# Altium PCB MCU Circuit.PcbDoc
Units mm, origin at the board's own origin, x right, y up, seen from the top; angles counter-clockwise.
Board outline 74 x 54 mm, 2 copper layers (Top Layer, Bottom Layer), stack 1.1 mm thick; 29 components, 31 nets, 128 pads, 42 vias.
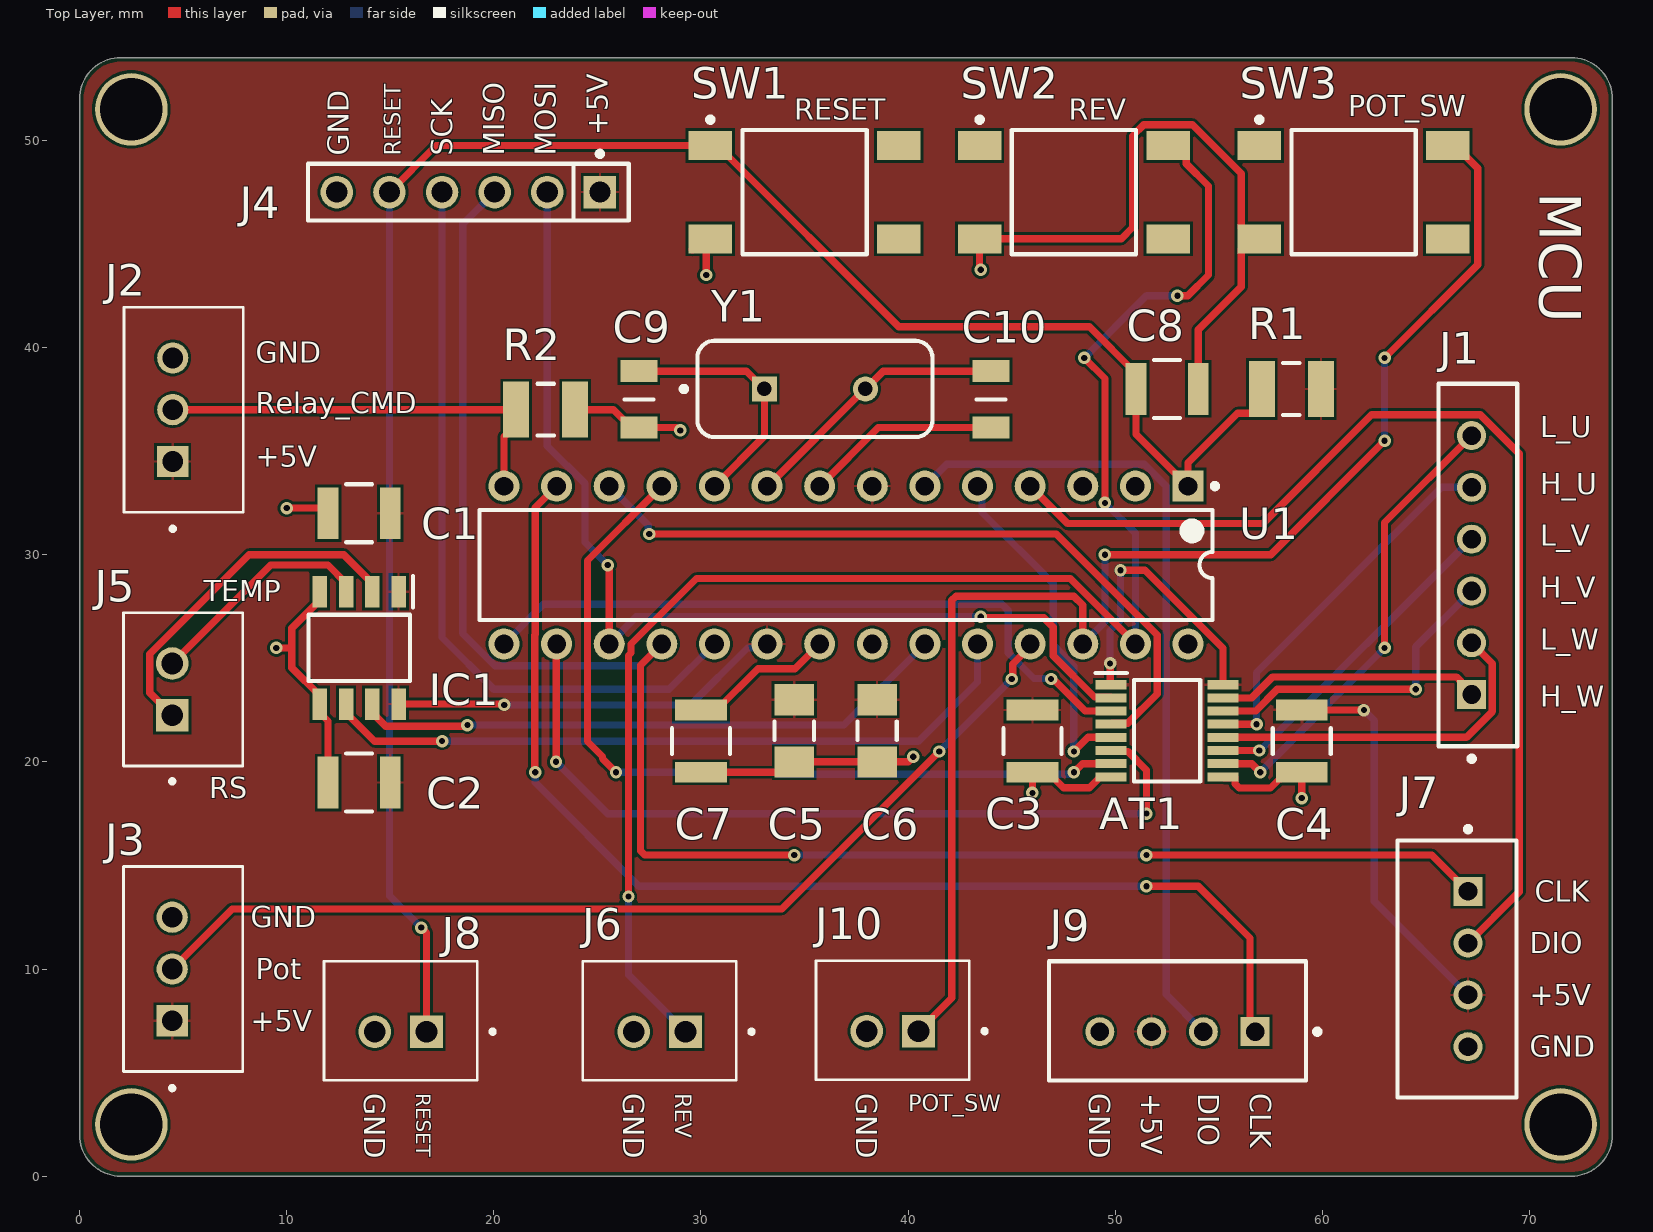
[diagram p0: Top Layer view]
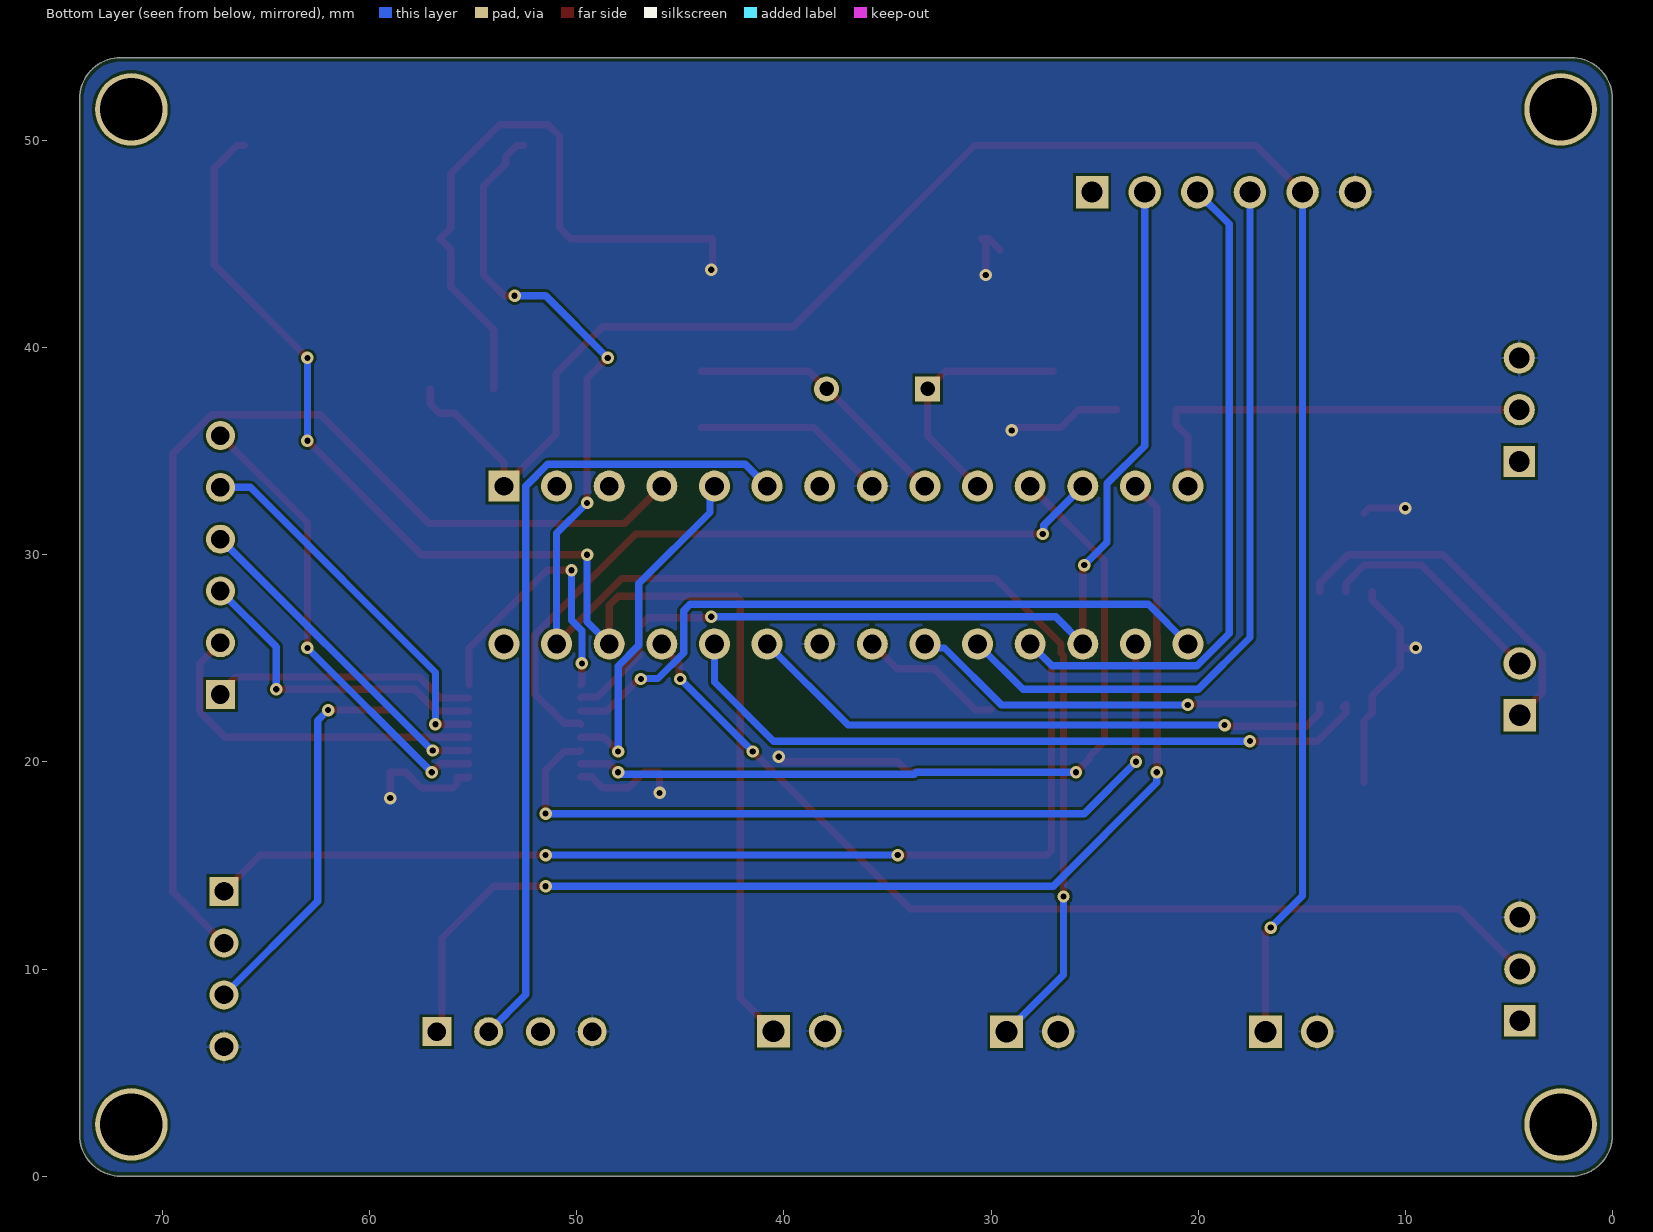
[diagram p1: Bottom Layer view, seen from below]
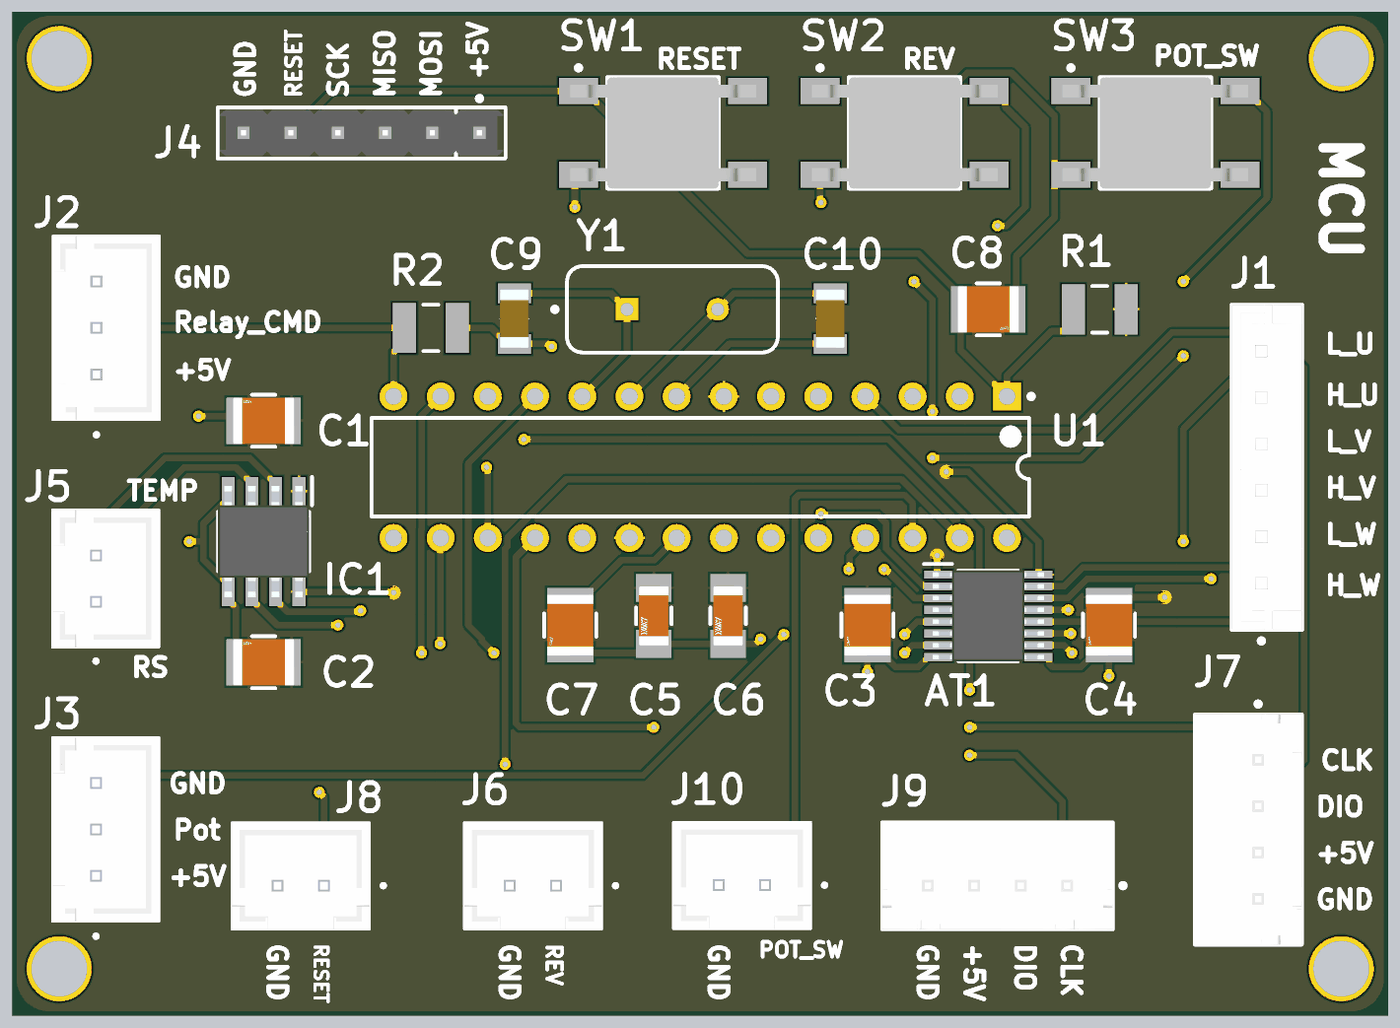
[diagram p2: 3D render of the assembled board from above, using the file's embedded part models]

## Layer stack, top to bottom
Top Solder: solder mask 0.05, Solder Resist, Dk 3.5
Top Layer: signal copper 0.1
Dielectric 1: dielectric 0.9, FR-4, Dk 4.8
Bottom Layer: signal copper 0.1
Bottom Solder: solder mask 0.05, Solder Resist, Dk 3.5

## Board outline
2,0 cw(c2,2) 0,2 0,52 cw(c2,52) 2,54 72,54 cw(c72,52) 74,52 74,2 cw(c72,2) 72,0

## Design rules (kind name [scope] priority, off if disabled: settings)
BoardOutlineClearance [All] p1: gap=0.2 ignorepadtopadclearanceinfootprint=FALSE
Clearance [All] p1: gap=0.127 ignorepadtopadclearanceinfootprint=FALSE except(0.25: Arc-Hole Track-Hole SMDPad-Hole THPad-Hole Via-Hole Fill-Hole Poly-Hole Region-Hole Text-Hole)
ComponentClearance [All] p1: gap=0.127 collisioncheckmode=3 verticalgap=0.127 showdistances=TRUE
DiffPairsRouting [All] p1: maxlimit=0.254 minlimit=0.127 mostfreqgap=0.127 toplayer_minwidth=0.127 toplayer_maxwidth=25.4 toplayer_prefwidth=0.127 bottomlayer_minwidth=0.127 bottomlayer_maxwidth=25.4 bottomlayer_prefwidth=0.127 maxuncoupledlength=12.7
Height [All] p1: minheight=0 maxheight=1816.048 prefheight=12.7
HoleSize [All] p1: absolutevalues=TRUE maxlimit=6.3 minlimit=0.3 maxpercent=80.000 minpercent=20.000
HoleToHoleClearance [All] p1: gap=0.25 allowstackedmicrovias=FALSE
MinimumAnnularRing [All] p1: minimumring=0.076
MinimumSolderMaskSliver [All] p1: minsoldermaskwidth=0
PlaneClearance [All] p1: clearance=0.127
PlaneConnect PlaneConnectPowerPads [InPadClass('PowerPads')] p1: planeconnectstyle=Direct reliefexpansion=0.508 reliefentries=4 reliefconductorwidth=0.254 reliefairgap=0.254
PlaneConnect [All] p2: pad.planeconnectstyle=Relief pad.reliefexpansion=0.3 pad.reliefentries=4 pad.reliefconductorwidth=0.127 pad.reliefairgap=0.127 via.planeconnectstyle=Direct via.reliefexpansion=0.3 via.reliefentries=4 via.reliefconductorwidth=0.127 via.reliefairgap=0.127
PolygonConnect PolygonConnectPowerPads [All vs (InPadClass('PowerPads'))] p1: connectstyle=Direct reliefconductorwidth=0.254 reliefentries=4 polygonreliefangle="90 Angle" airgapwidth=0.254
PolygonConnect [All] p2: thpad.connectstyle=Relief thpad.reliefconductorwidth=0.127 thpad.reliefentries=4 thpad.polygonreliefangle="90 Angle" thpad.airgapwidth=0.127 smdpad.connectstyle=Relief smdpad.reliefconductorwidth=0.127 smdpad.reliefentries=4 smdpad.polygonreliefangle="90 Angle" smdpad.airgapwidth=0.127 via.connectstyle=Direct via.reliefconductorwidth=0.127 via.reliefentries=4 via.polygonreliefangle="90 Angle" via.airgapwidth=0.127
RoutingVias [All] p1: holewidth=0.3 width=0.6 viastyle="Through Hole" minholewidth=0.3 minwidth=0.6 maxholewidth=0.6 maxwidth=6.6
SilkToSilkClearance [All] p1: silktosilkclearance=0
SilkToSolderMaskClearance [IsPad] p1: minsilkscreentomaskgap=0.127 clearancetoexposedcopper=TRUE
SolderMaskExpansion [All] p1: expansion=0.075 istentingtop=FALSE
Width [All] p1: maxlimit=0.4 minlimit=0.35 preferedwidth=0.35
20 further rules are at their usual default settings.

## Components (designator, comment, footprint, x,y, rotation, side; value= is the part's Value field where it differs from the comment)
AT1 "SI8065AA-B-IUR" SOP64P600X175-16N 52.5,21.5 r0 top
C1 "100nF/25V" FP-1210-L_3_3_0_4-W_2_5_0-MFG 13.5,32 r180 top
C2 "100nF/25V" FP-1210-L_3_3_0_4-W_2_5_0-MFG 13.5,19 r180 top
C3 "100nF/25V" FP-1210-L_3_3_0_4-W_2_5_0-MFG 46,21 r270 top
C4 "100nF/25V" FP-1210-L_3_3_0_4-W_2_5_0-MFG 59,21 r270 top
C5 "10uF/16V" FP-1206-L_3_2_0_2-W_1_6_0-IPC_A 34.5,21.5 r270 top
C6 "10uF/16V" FP-1206-L_3_2_0_2-W_1_6_0-IPC_A 38.5,21.5 r270 top
C7 "100nF/25V" FP-1210-L_3_3_0_4-W_2_5_0-MFG 30,21 r270 top
C8 "100nF/25V" FP-1210-L_3_3_0_4-W_2_5_0-MFG 52.5,38 r0 top
C9 "22pF/10V" CAPC3216X90N 27,37.5 r90 top
C10 "22pF/10V" CAPC3216X90N 44,37.5 r90 top
IC1 "SI8620AB-B-IS" SOIC127P600X175-8N 13.5,25.5 r270 top
J1 "B6B-EH-A(LF)(SN)" FP-B6B-EH-A_LF_SN-MFG 67.5,29.5 r90 top
J2 "B3B-XH-A_(LF)(SN)" "JST_B3B-XH-A (LF)(SN)" 5.025,37 r270 top
J3 "B3B-XH-A_(LF)(SN)" "JST_B3B-XH-A (LF)(SN)" 5,10 r270 top
J4 "22-28-4060" FP-22-28-4060-MFG 18.77,47.5 r180 top
J5 "B2B-XH-A_(LF)(SN)" JST_B2B-XH-A_(LF)(SN) 5,23.5 r270 top
J6 "B2B-XH-A_(LF)(SN)" JST_B2B-XH-A_(LF)(SN) 28,7.5 r0 top
J7 "B4B-XH-A(LF)(SN)" FP-B4B-XH-A_LF_SN-MFG 66.5,10 r90 top
J8 "B2B-XH-A_(LF)(SN)" JST_B2B-XH-A_(LF)(SN) 15.5,7.5 r0 top
J9 "B4B-XH-A(LF)(SN)" FP-B4B-XH-A_LF_SN-MFG 53,7.5 r0 top
J10 "B2B-XH-A_(LF)(SN)" JST_B2B-XH-A_(LF)(SN) 39.25,7.525 r0 top
R1 "10k" RESC3225X70X50NL20T20 58.5,38 r0 top
R2 "3.3k" RESC3225X70X50NL20T20 22.5,37 r180 top
SW1 "FSM4JSMATR" TECO-FSM4JSMATR_V 35,47.5 r90 top
SW2 "FSM4JSMATR" TECO-FSM4JSMATR_V 48,47.5 r90 top
SW3 "FSM4JSMATR" TECO-FSM4JSMATR_V 61.5,47.5 r90 top
U1 "ATmega328-PU" 28P3 37,29.5 r270 top
Y1 "16MHz" FOX-FOXSLF160-20 35.5,38 r0 top

## Footprints (in the part's own frame and the unit in brackets; to place one, negate y for a bottom-side part, rotate by r counter-clockwise, add the part's x,y. Pads: shape width x height; smd on the part's side, far side on the other; paste and mask are expansions set on the pad)
28P3 [mm] "28-Pin Plastic Dual In-Line Package (PDIP)"
  rect 1.5x1.5 hole 0.9: 1(-3.81,16.51)
  round 1.5 hole 0.9: 2(-3.81,13.97) 3(-3.81,11.43) 4(-3.81,8.89) 5(-3.81,6.35) 6(-3.81,3.81) 7(-3.81,1.27) 8(-3.81,-1.27) 9(-3.81,-3.81) 10(-3.81,-6.35) 11(-3.81,-8.89) 12(-3.81,-11.43) 13(-3.81,-13.97) 14(-3.81,-16.51) 15(3.81,-16.51) 16(3.81,-13.97) 17(3.81,-11.43) 18(3.81,-8.89) 19(3.81,-6.35) 20(3.81,-3.81) 21(3.81,-1.27) 22(3.81,1.27) 23(3.81,3.81) 24(3.81,6.35) 25(3.81,8.89) 26(3.81,11.43) 27(3.81,13.97) 28(3.81,16.51)
  silkscreen extent -3.93,-17.7 2.65,17.94, body extent -3.6,-17.65 3.6,17.65, height 4.58
CAPC3216X90N [mm]
  rect 1.06x1.78 smd: 1(-1.36,0) 2(1.36,0)
  silkscreen extent 0,-0.7 0,0.7, body extent -1.6,-0.8 1.6,0.8, height 0.9
FOX-FOXSLF160-20 [mm] "THD, 2-Leads, Body 11.35x4.65mm"
  rect 1.2x1.2 hole 0.7: 1(-2.44,0)
  round 1.2 hole 0.7: 2(2.44,0)
  silkscreen extent -6.45,-2.32 5.68,2.32, body extent -5.67,-2.32 5.68,2.33, height 3.6
FP-22-28-4060-MFG [mm]
  rect 1.57x1.57 hole 1.02 paste-1000 mask+0: 1(-6.35,0)
  round 1.57 hole 1.02 paste-1000 mask+0: 2(-3.81,0) 3(-1.27,0) 4(1.27,0) 5(3.81,0) 6(6.35,0)
  silkscreen extent -7.75,-1.97 7.75,1.37, body extent -7.85,-1.47 7.85,1.47, height 0.25
FP-1206-L_3_2_0_2-W_1_6_0-IPC_A [mm]
  rect 1.505x1.906 smd paste+0 mask+0: 1(-1.501,0) 2(1.501,0)
  silkscreen extent -0.45,-0.95 0.45,0.95, body extent -2.75,-1.45 2.75,1.45, height 0.25
FP-1210-L_3_3_0_4-W_2_5_0-MFG [mm]
  rect 1x2.5 smd paste+0 mask+0: 1(-1.5,0) 2(1.5,0)
  silkscreen extent -0.63,-1.4 0.63,1.4, body extent -2.1,-1.45 2.1,1.45, height 0.25
FP-B4B-XH-A_LF_SN-MFG [mm]
  rect 1.4x1.4 hole 0.9 paste-1000 mask+0: 1(3.75,-0.525)
  round 1.4 hole 0.9 paste-1000 mask+0: 2(1.25,-0.525) 3(-1.25,-0.525) 4(-3.75,-0.525)
  silkscreen extent -6.2,-2.88 6.87,2.88, body extent -6.3,-2.98 6.3,2.98, height 0.25
FP-B6B-EH-A_LF_SN-MFG [mm]
  rect 1.4x1.4 hole 0.9 paste-1000 mask+0: 1(-6.25,0.3)
  round 1.4 hole 0.9 paste-1000 mask+0: 2(-3.75,0.3) 3(-1.25,0.3) 4(1.25,0.3) 5(3.75,0.3) 6(6.25,0.3)
  silkscreen extent -9.47,-1.9 8.75,1.9, body extent -8.85,-2 8.85,2, height 0.25
JST_B2B-XH-A_(LF)(SN) [mm]
  rect 1.575x1.575 / inner round 1.575 / far side rect 1.575x1.575 hole 1.05: 1(1.25,-0.525)
  round 1.575 hole 1.05: 2(-1.25,-0.525)
  silkscreen extent -3.7,-2.88 4.54,2.88, body extent -3.7,-2.88 3.7,2.88, height 7
"JST_B3B-XH-A (LF)(SN)" [mm]
  rect 1.508x1.508 / inner round 1.508 / far side rect 1.508x1.508 hole 1: 1(2.5,-0.525)
  round 1.508 hole 1: 2(0,-0.525) 3(-2.5,-0.525)
  silkscreen extent -4.95,-2.88 5.85,2.88, body extent -4.95,-2.88 4.95,2.88, height 7
RESC3225X70X50NL20T20 [mm] "Chip Resistor, 2-Leads, Body 3.20x2.50mm, IPC Medium Density"
  rect 1.25x2.7 smd: 1(-1.425,0) 2(1.425,0)
  silkscreen extent -0.4,-1.25 0.4,1.25, body extent -1.7,-1.35 1.7,1.35, height 0.7
SOIC127P600X175-8N [mm]
  rect 1.525x0.7 smd: 1(-2.712,1.905) 2(-2.712,0.635) 3(-2.712,-0.635) 4(-2.712,-1.905) 5(2.712,-1.905) 6(2.712,-0.635) 7(2.712,0.635) 8(2.712,1.905)
  silkscreen extent -3.47,-2.45 1.6,2.61, body extent -3,-2.45 3,2.45, height 1.75
SOP64P600X175-16N [mm]
  rect 1.5x0.435 smd: 1(-2.7,2.222) 2(-2.7,1.588) 3(-2.7,0.952) 4(-2.7,0.318) 5(-2.7,-0.318) 6(-2.7,-0.952) 7(-2.7,-1.588) 8(-2.7,-2.222) 9(2.7,-2.222) 10(2.7,-1.588) 11(2.7,-0.952) 12(2.7,-0.318) 13(2.7,0.318) 14(2.7,0.952) 15(2.7,1.588) 16(2.7,2.222)
  silkscreen extent -3.45,-2.44 1.6,2.79, body extent -3,-2.44 3,2.44, height 1.75
TECO-FSM4JSMATR_V [mm] "SMD, 4-Leads, Body 6x6mm, Pitch 4.5mm"
  rect 1.4x2.1 smd: 1(2.25,4.55) 2(2.25,-4.55) 3(-2.25,4.55) 4(-2.25,-4.55)
  silkscreen extent -3,-3 3.62,4.67, body extent -3,-5 3,5, height 5.08

## Part data
AT1: "Attenuator or Isolator", Manufacturer_Name="Silicon Labs", Mouser Part Number=634-SI8065AA-B-IUR, Arrow Part Number=SI8065AA-B-IUR, Arrow Price/Stock=https://www.arrow.com/en/products/si8065aa-b-iur/silicon-labs, Datasheet Link=https://www.mouser.com/datasheet/2/368/Si80xx-1kV-1398000.pdf, Height=1.75mm, Manufacturer_Part_Number=SI8065AA-B-IUR, Mouser Price/Stock=https://www.mouser.com/Search/Refine.aspx?Keyword=634-SI8065AA-B-IUR
C1 C2 C3 C4 C7 C8: library part CMP-1038-01657-2, "General Purpose Ceramic Capacitor, 1210, 100nF, 10%, X7R, +15%, 50V", Capacitance=100nF, Case Code (Imperial)=1210, Case Code (Metric)=3225, Dielectric=X7R, Insulation Resistance=100GR, Max Operating Temperature=125°C, Min Operating Temperature=-55°C, Package Quantity=1, Tolerance=10%, Voltage=50V, Case/Package=1210, Construction=Flat, Depth=2.5mm, Dissipation Factor=2.5%, Height=0.94mm, Lead Free="Lead Free", Length=3.2mm, Mount="Surface Mount", Number of Pins=2, Packaging="Tape and Reel", REACH SVHC="No SVHC", RoHS Compliant=Yes, Series=-, Termination=SMD/SMT, Thickness=0.037inch, Voltage Rating=50V, Voltage Rating (DC)=50V, Width=0.098inch
C5 C6: library part CMP-04427-021870-1, "General Purpose Ceramic Capacitor, 1206, 10uF, 10%, X5R, 15%, 10V", Capacitance=10uF, Case Code (Imperial)=1206, Case Code (Metric)=3216, Dielectric=X5R, Max Operating Temperature=85°C, Min Operating Temperature=-55°C, Package Quantity=1, Tolerance=10%, Voltage=10V, Case/Package=1206, Construction=Flat, Contact Plating=Tin, Depth=1.6mm, Height=0.07mm, Lead Free="Lead Free", Length=3.2mm, Mount="Surface Mount", Number of Pins=2, Packaging="Tape and Reel", Radiation Hardening=No, REACH SVHC="No SVHC", RoHS Compliant=Yes, Series=-, Size=1.78mm, Termination=SMD/SMT, Thickness=0.07inch, Voltage Rating=10V, Voltage Rating (DC)=10V, Width=0.063inch
C9 C10: library part 885012008002, "Capacitor", Manufacturer_Name="Wurth Elektronik", Mouser Part Number=710-885012008002, Datasheet Link=https://katalog.we-online.com/pbs/datasheet/885012008002.pdf, Height=0.9mm, Manufacturer_Part_Number=885012008002, Mouser Price/Stock=https://www.mouser.com/Search/Refine.aspx?Keyword=710-885012008002
IC1: "Integrated Circuit", Manufacturer_Name=Skyworks, Mouser Part Number=634-SI8620AB-B-IS, Arrow Part Number=SI8620AB-B-IS, Arrow Price/Stock=https://www.arrow.com/en/products/si8620ab-b-is/skyworks-solutions?region=nac, Datasheet Link=https://www.skyworksinc.com/-/media/Skyworks/SL/documents/public/data-sheets/si86xx-1Mbps-datasheet.pdf, Height=1.75mm, Manufacturer_Part_Number=SI8620AB-B-IS, Mouser Price/Stock=https://www.mouser.co.uk/ProductDetail/Skyworks-Solutions-Inc/SI8620AB-B-IS?qs=j6MGy4L9yX39miC9%252BsIUmA%3D%3D
J1: library part CMP-17439-000293-1, "CONN HEADER VERT 6POS 2.5MM", Color=Natural, Current Rating=3A, Flammability Rating="UL94 V-0", Housing Color=White, Voltage Rating=250V, Connector Type=Header, Contact Finish - Mating=TIN, Contact Material=Brass, Contact Mating Length=0.13inch, Contact Plating=Tin, Contact Shape=Square, Contact Type="Male Pin", Fastening Type=Friction, Gender=Male, Insulation Color=Natural, Insulation Material=Nylon, Lead Free="Lead Free", Mated Stacking Heights=8.1mm, Mount="Through Hole", Number of Contacts=6, Number of Positions=6, Number of Rows=1, Orientation=Straight, Packaging=Bulk, Pitch=2.5mm, Series=EH, Termination=Solder
J2 J3: "Connector Header Through Hole 3 position 0.098 (2.50mm)", Package=None, Check_prices=https://www.snapeda.com/parts/B3B-XH-A%20(LF)(SN)/JST+Sales+America+Inc./view-part/?ref=eda, MF="JST Sales America Inc.", MP="B3B-XH-A (LF)(SN)", SnapEDA_Link=https://www.snapeda.com/parts/B3B-XH-A%20(LF)(SN)/JST+Sales+America+Inc./view-part/?ref=snap
J4: library part CMP-04776-000763-1, "CONN HEADER VERT 6POS 2.54MM", Color=Black, Contact Resistance=20mR, Current Rating=4A, Max Operating Temperature=75°C, Max Voltage Rating (AC)=250V, Max Voltage Rating (DC)=250.25kV, Min Operating Temperature=0°C, Package Quantity=1, Connector Type="Male Pin", Contact Material=Brass, Contact Mating Length=0.24inch, Contact Plating=Tin, Contact Type="Male Pin", Depth=2.49mm, Gender=Male, Housing Color=Black, Housing Material=Thermoplastic, Length=15.24mm, Mount="Through Hole", Number of Contacts=6, Number of Positions=6, Number of Rows=1, Orientation=Straight, Packaging=Bulk, Pitch=2.54mm, RoHS Compliant=Yes, Series="KK® 42375", Termination=Solder, Voltage Rating=250V
J5 J6 J8 J10: "Connector Header Through Hole 2 position 0.098 (2.50mm)", Package=None, Check_prices=https://www.snapeda.com/parts/B2B-XH-A%20(LF)(SN)/JST+Sales+America+Inc./view-part/?ref=eda, MF="JST Sales", MP="B2B-XH-A (LF)(SN)", SnapEDA_Link=https://www.snapeda.com/parts/B2B-XH-A%20(LF)(SN)/JST+Sales+America+Inc./view-part/?ref=snap
J7 J9: library part CMP-17439-000250-1, "CONN HEADER VERT 4POS 2.5MM", Color=Natural, Contact Resistance=20mR, Current Rating=3A, Flammability Rating="UL94 V-0", Housing Color=White, Insulation Resistance=1GR, Max Operating Temperature=85°C, Max Voltage Rating (AC)=250V, Min Operating Temperature=-25°C, Package Quantity=500, Connector Type=Header, Contact Finish - Mating=TIN, Contact Material=Brass, Contact Plating=Tin, Contact Shape=Square, Contact Type="Male Pin", Depth=5.75mm, Fastening Type=Detent, Gender=Male, Housing Material=Polyamide, Insulation Color=Natural, Insulation Material=Nylon, Lead Free="Lead Free", Lead Pitch=2.5mm, Length=12.4mm, Mated Stacking Heights=9.8mm, Material=Polyamide, Max Current Rating=3A, Max Voltage Rating (DC)=250V, Mount="Through Hole", Number of Contacts=4, Number of Positions=4, Number of Rows=1, Orientation=Straight, Packaging=Bulk, Pitch=2.5mm, REACH SVHC="No SVHC", Series=XH, Termination=Solder, Voltage Rating=250V, Voltage Rating (AC)=250V, Wire/Cable Gauge=22AWG
R1: library part CMP-2005-03838-2, "1210", Manufacturer=Panasonic, Part Number=ERJ-L14KF10CU
R2: library part CMP-2005-03838-2, "3.3k 0.5W 1210 SMD Resistor", Manufacturer=Panasonic, Part Number=ERJ-L14KF10CU
SW1 SW2 SW3: library part CMP-2000-07486-1, "Micro Miniature Push Button Switch FSM JSM, 50 mA, -35 to 85 degC, 4-Pin SMD, RoHS, Tape and Reel", Capacitance=0f, Case\/Package=SMD/SMT, Contact Current Rating=50mA, Contact Resistance=100mOhm, Manufacturer="TE Connectivity", Max Operating Temperature=85degC, Max Voltage Rating (DC)=12V, Min Operating Temperature=-35degC, Operating Force=160gf, Package Description="4-Pin Surface Mount Device, Body 6 x 6 mm, Pitch 4.5 mm", Package Quantity=1200, Voltage Rating (DC)=24V, Actuator Length=0.055inch, Actuator Material=Polyamide, Contact Material=CopperAlloy, Contact Plating=Silver, Current Rating=50mA, Datasheet URL=http://www.te.com/commerce/DocumentDelivery/DDEController?Action=showdoc&DocId=Customer+Drawing%7F2-1437565-7%7FV%7Fpdf%7FEnglish%7FENG_CD_2-1437565-7_V.pdf%7F4-1437565-2, Datasheet Version="Rev. V, 02/2015", Electrical Life=100000Cycles, Illumination Type=Illuminated, Manufacturer URL=http://www.te.com/, Mechanical Life=100000Cycles, Mount=SurfaceMount, Mounting Technology=SurfaceMount, Orientation=Straight, Package Reference=FSM4JSMATR, Packaging=TapeandReel, REACH SVHC=Unknown, RoHSCompliant=true, Switch Travel=0.25mm, Termination=GullWing, Throw Configuration=SPST
U1: library part CMP-0095-00015-2, "8-bit AVR Microcontroller, 32KB Flash, 1KB EEPROM, 2KB SRAM, 28-pin PDIP, Industrial Grade (-40°C to 85°C)", ComponentLink1Description="Manufacturer URL", ComponentLink1URL=http://www.atmel.com/, ComponentLink2Description="ATmega48A/48PA/88A/88PA/168A/168PA/328/328P Datasheet", ComponentLink2URL=http://www.atmel.com/dyn/resources/prod_documents/8271.pdf, ComponentLink3Description="ATmega48A/48PA/88A/88PA/168A/168PA/328/328P Summary", ComponentLink3URL=http://www.atmel.com/dyn/resources/prod_documents/8271S.pdf, DatasheetVersion="revD, May-2011", PackageDescription="28-lead (0.300\"/7.62mm Wide) Plastic Dual Inline Package (PDIP)", PackageReference=28P3, PackageVersion="revB, Sep-2001", RevisionNote="DatasheetVersion updated. URLs added."
Y1: library part CMP-1749-00003-1, "Resistance Weld Thru-Hole Crystal, 16 MHz, -20 to 70 degC, 2-Pin THD, RoHS, Bulk", Case\Package=Axial, Max Operating Temperature="155 degC", Min Operating Temperature="-55 degC", Package Quantity=200, Power Rating="250 mW", Resistance="221 kohm", Tolerance=1%, Voltage Rating="250 V", ComponentLink1Description="Manufacturer URL", ComponentLink1URL=http://www.foxonline.com/, ComponentLink2Description=Datasheet, ComponentLink2URL=http://www.foxonline.com/pdfs/hc49slf.pdf, DatasheetVersion=Mar-15, Length="0.248 inch", Mount="Through Hole", PackageDescription="2-Pin Through Hole Device, Body 11.35 x 4.65 mm", PackageReference=FOXSLF160-20, Packaging=Bulk, RoHSCompliant=true

## Free pads (board coordinates)
  round 3.5 hole 3: 5(2.5,2.5) 5(2.5,51.5) 5(71.5,2.5) 5(71.5,51.5)

## Via types
v1: diameter 0.6, hole 0.3, Top Layer to Bottom Layer, 42 vias

## Nets (pads, with @x,y where several pads share a name; then routed paths per layer and width w, separated by ;. In a path a pad name is that pad's centre, name@x,y a point inside that pad or via, vN(x,y) a via of type N, cw(c..) or ccw(c..) an arc to the next point about the centre after c; other vN are vias at no path point)
+5V: AT1.1 AT1.16 C1.1 C2.1 C3.1 C4.1 C5.1 C6.1 IC1.1 IC1.8 J2.1 J3.1 J4.1 J7.3 J9.3 R1.2 U1.7 U1.20 | length 51.9
  Top Layer w0.35: IC1.8 20.462,22.788 v1(20.5,22.75) ; v1(49.75,24.75) 49.75,23.764 49.792,23.722 AT1.1 ; v1(50.25,29.25) 51.438,29.25 55.2,25.488 AT1.16 ; C4.1 v1(62,22.5)
  Bottom Layer w0.35: v1(20.5,22.75) 29.5,22.75 32.25,25.5 33,25.5 U1.20 ; v1(49.75,24.75) 49.743,24.757 49.743,26.328 50.25,26.835 v1(50.25,29.25) ; v1(62,22.5) 62.5,22 62.5,13.275 J7.3
CLK1/MISO: J4.3 J7.1 U1.18 | length 83.8
  Top Layer w0.35: U1.18 27.079,24.659 27.079,15.705 27.284,15.5 v1(34.5,15.5) ; v1(51.5,15.5) 65.275,15.5 J7.1
  Bottom Layer w0.35: J4.3 18.5,45.96 18.5,26.192 20.054,24.638 27.058,24.638 U1.18 ; v1(34.5,15.5) v1(51.5,15.5)
CLK2: J9.1 U1.13 | length 57
  Top Layer w0.35: v1(22,19.5) 21.978,19.522 21.978,26.126 22,26.148 22,32.28 U1.13 ; v1(51.5,14) 54,14 56.5,11.5 56.5,7.225 J9.1
  Bottom Layer w0.35: v1(22,19.5) 22,19 27,14 v1(51.5,14)
DIO1: J7.2 U1.4 | length 52
  Top Layer w0.35: U1.4 47.7,31.5 57.12,31.5 62.372,36.752 67.615,36.752 69.5,34.867 69.5,13.725 J7.2
DIO2: J9.2 U1.6 | length 39.6
  Bottom Layer w0.35: U1.6 41.862,34.362 51.406,34.362 52.458,33.31 52.458,8.767 J9.2
GND: AT1.8 AT1.9 C1.2 C2.2 C3.2 C4.2 C5.2 C6.2 C7.2 C8.2 C9.1 C10.1 IC1.4 IC1.5 J2.3 J3.3 J4.6 J6.2 J7.4 J8.2 J9.4 J10.2 R2.1 SW1.3 SW2.3 SW3.3 U1.8 U1.22 | length 84.5
  Top Layer w0.35: v1(9.5,25.5) 10.25,25.5 ; v1(10,32.25) 11.75,32.25 C1.2 ; IC1.4 11.595,27.8 10.25,26.455 10.25,25.5 ; C2.2 12,21.971 11.595,22.376 IC1.5 11.595,23.2 10.25,24.545 10.25,25.5 ; R2.1 25.78,37 26.64,36.14 28.792,36.14 28.932,36 v1(29,36) ; SW1.3@29.575,44.725 30.1,45.25 SW1.3 30.25,45.05 v1(30.25,43.5) ; C7.2 34.001,19.5 C5.2 C6.2 39.999,19.999 v1(40.25,20.25) ; U1.8 38.56,36.14 C10.1 ; v1(43.5,43.75) 43.45,43.8 SW2.3 50.295,45.25 50.835,45.79 50.835,50.212 51.375,50.752 53.725,50.752 56.075,48.402 56.075,45.775 56.6,45.25 56.075,44.725 56.075,42.938 54,40.863 C8.2 ; v1(46,18.5) C3.2 46.75,19.5 47.5,18.75 48.75,18.75 49.225,19.225 49.225,19.236 49.268,19.278 AT1.8 ; AT1.9 55.243,19.236 55.775,19.236 55.775,18.946 55.98,18.741 57.491,18.741 58.25,19.5 C4.2 v1(59,18.25)
Iso_HIn_U: AT1.13 J1.5 | length 18.2
  Top Layer w0.35: AT1.13 v1(56.818,21.818)
  Bottom Layer w0.35: v1(56.818,21.818) 56.818,24.318 65.75,33.25 J1.5
Iso_HIn_V: AT1.14 J1.3 | length 15.6
  Top Layer w0.35: AT1.14 56.775,22.452 57.823,23.5 v1(64.5,23.5)
  Bottom Layer w0.35: v1(64.5,23.5) 64.5,25.55 J1.3
Iso_HIn_W: AT1.15 J1.1 | length 12.8
  Top Layer w0.35: AT1.15 56.588,23.088 57.602,24.102 66.47,24.102 66.675,23.897 66.675,23.775 J1.1
Iso_LIn_U: AT1.10 J1.6 | length 22.4
  Top Layer w0.35: AT1.10 56.588,19.912 v1(57,19.5) ; v1(63,25.5) 63,31.55 J1.6
  Bottom Layer w0.35: v1(57,19.5) v1(63,25.5)
Iso_LIn_V: AT1.11 J1.4 | length 16.2
  Top Layer w0.35: AT1.11 v1(56.952,20.548)
  Bottom Layer w0.35: v1(56.952,20.548) 56.975,20.548 67.177,30.75 J1.4
Iso_LIn_W: AT1.12 J1.2 | length 17.3
  Top Layer w0.35: AT1.12 66.959,21.182 68.202,22.425 68.202,24.748 J1.2
NetC7_1: C7.1 U1.21 | length 7.1
  Top Layer w0.35: C7.1 30.75,22.5 32.75,24.5 34.54,24.5 U1.21
NetC9_2: C9.2 U1.10 Y1.1 | length 12.1
  Top Layer w0.35: C9.2 32.2,38.86 Y1.1 33.06,35.72 U1.10
NetC10_2: C10.2 U1.9 Y1.2 | length 13.1
  Top Layer w0.35: U1.9 33.22,33.31 37.91,38 Y1.2 38.8,38.86 C10.2
Pot_In: J3.2 U1.25 | length 48.7
  Top Layer w0.35: J3.2 7.373,12.898 33.898,12.898 v1(41.5,20.5) ; v1(45,24) 45.048,24.048 45.048,24.729 45.89,25.571 U1.25 U1.25@45.67,25.47
  Bottom Layer w0.35: v1(41.5,20.5) v1(45,24)
POT_SWITCH: J10.1 SW3.2 U1.26 | length 67.4
  Top Layer w0.35: J10.1 42.102,8.602 42.102,27.795 42.307,28 48,28 48.43,27.57 U1.26 ; v1(49.5,30) 57.5,30 v1(63,35.5) ; v1(63,39.5) 67.5,44 67.5,48.65 66.4,49.75 SW3.2
  Bottom Layer w0.35: U1.26 49.5,26.76 v1(49.5,30) ; v1(63,35.5) v1(63,39.5)
Relay_CMD: J2.2 R2.2 U1.14 | length 20.5
  Top Layer w0.35: J2.2 R2.2 21.075,36.275 20.49,35.69 U1.14
RESET: C8.1 J4.5 J8.1 R1.1 SW1.1 U1.1 | length 95.9
  Top Layer w0.35: J4.5 17.21,49.75 SW1.1 30.8,49.75 39.55,41 48.75,41 51,38.75 C8.1 51,35.82 U1.1 53.51,34.435 55.9,36.825 56.625,36.825 57.075,37.275 R1.1 ; v1(16.5,12) 16.75,11.75 J8.1
  Bottom Layer w0.35: J4.5 14.96,13.54 v1(16.5,12)
Reverse: J6.1 SW2.2 U1.27 | length 76.6
  Top Layer w0.35: v1(26.5,13.5) 26.5,25.132 26.622,25.254 26.622,25.69 29.784,28.852 47.823,28.852 50.97,25.705 U1.27 ; v1(48.5,39.5) 49.5,38.5 v1(49.5,32.5) ; SW2.2 52.9,49.75 53.425,49.225 53.425,48.875 54.5,47.8 54.5,43.5 53.5,42.5 v1(53,42.5)
  Bottom Layer w0.35: v1(26.5,13.5) 26.5,9.725 J6.1 ; v1(48.5,39.5) 51.5,42.5 v1(53,42.5) ; v1(49.5,32.5) 50.97,31.03 U1.27
RS: IC1.2 J5.1 | length 17.1
  Top Layer w0.35: J5.1 3.385,23.34 3.385,25.201 8.184,30 12.759,30 14.135,28.624 IC1.2
SCK: J4.4 U1.19 | length 36.6
  Bottom Layer w0.35: J4.4 17.5,26 20,23.5 28.46,23.5 U1.19
TEMP: IC1.3 J5.2 | length 11.1
  Top Layer w0.35: J5.2 9.225,29.5 11.99,29.5 12.865,28.624 IC1.3
uC_Iso_HIn_U: AT1.4 U1.12 | length 35.3
  Top Layer w0.35: v1(27.5,31) 47.148,31 52.022,26.126 52.022,23.279 50.603,21.86 49.843,21.86 AT1.4
  Bottom Layer w0.35: U1.12 27.452,31.428 27.452,31.048 v1(27.5,31)
uC_Iso_HIn_V: AT1.3 U1.15 | length 33.4
  Top Layer w0.35: v1(46.898,24) 46.966,24 47.091,23.875 47.125,23.875 48.548,22.452 AT1.3
  Bottom Layer w0.35: U1.15 22.402,27.602 44.531,27.602 44.838,27.295 44.838,25.254 46.073,24.019 46.879,24.019 v1(46.898,24)
uC_Iso_HIn_W/MOSI: AT1.2 J4.2 U1.17 | length 50.2
  Top Layer w0.35: v1(25.5,29.5) 25.548,29.452 25.548,29.275 25.57,29.253 U1.17 ; v1(43.5,27) 43.548,26.952 46.548,26.952 47,26.5 47,25.127 48.997,23.13 49.758,23.13 AT1.2
  Bottom Layer w0.35: J4.2 22.58,35.248 24.407,33.421 24.407,30.593 v1(25.5,29.5) ; U1.17 26.88,27 v1(43.5,27)
uC_Iso_LIn_U: AT1.7 U1.11 | length 40
  Top Layer w0.35: v1(25.898,19.5) 25.242,20.156 25.242,20.258 24.518,20.982 24.518,29.718 U1.11 ; v1(48,19.5) 48.412,19.912 AT1.7
  Bottom Layer w0.35: v1(25.898,19.5) 33.608,19.5 33.71,19.398 47.83,19.398 47.932,19.5 v1(48,19.5)
uC_Iso_LIn_V: AT1.6 U1.16 | length 39.4
  Top Layer w0.35: v1(23,20) 23.015,20.015 23.015,25.675 U1.16 ; AT1.6 49.843,20.506 50.601,20.506 51.5,19.607 v1(51.5,17.5)
  Bottom Layer w0.35: v1(23,20) 25.5,17.5 v1(51.5,17.5)
uC_Iso_LIn_W: AT1.5 U1.5 | length 16.8
  Top Layer w0.35: v1(48,20.5) 48.682,21.182 AT1.5
  Bottom Layer w0.35: U1.5 43.57,33.09 43.57,32.038 47,28.608 47,25.632 48,24.632 v1(48,20.5)
uC_RS: IC1.7 U1.23 | length 29
  Top Layer w0.35: IC1.7 14.135,22.376 14.787,21.723 18.67,21.723 v1(18.723,21.777)
  Bottom Layer w0.35: v1(18.723,21.777) 36.897,21.777 U1.23
uC_TEMP: IC1.6 U1.24 | length 34.7
  Top Layer w0.35: IC1.6@13,22.653 IC1.6 12.865,22.376 14.24,21 v1(17.5,21)
  Bottom Layer w0.35: v1(17.5,21) 40.5,21 43.35,23.85 U1.24
pads on no net: SW1.2 SW1.4 SW2.1 SW2.4 SW3.1 SW3.4 U1.2 U1.3 U1.28

## Polygon pours and split planes (outlines as drawn)
+5V on Top Layer "+5V_L01_P000" (solid, remove dead copper, pour order 0): 0,54 0,0 74,0 74,54
GND on Bottom Layer "GND_L02_P001" (solid, remove dead copper, pour order 1): -0.102,54 -0.102,0 74.102,0 73.898,0.204 73.898,54

## Silkscreen, mask and mechanical layers (free items; w line width, h text height)
Top Overlay:
  text "POT_SW" at 61.254,51.171 h1
  text "RESET" at 34.504,51.004 h1
  text "REV" at 47.754,51.004 h1
  text "+5V" at 25.496,50.254 h1 r90
  text "GND" at 12.996,49.254 h1 r90
  text "RESET" at 15.496,49.254 h0.8 r90
  text "SCK" at 17.996,49.254 h1 r90
  text "MISO" at 20.496,49.254 h1 r90
  text "MOSI" at 22.996,49.254 h1 r90
  text "MCU" at 70.5,47.5 h2 r270
  text "GND" at 8.504,39.254 h1
  text "Relay_CMD" at 8.504,36.837 h1
  text "L_U" at 70.504,35.671 h1
  text "+5V" at 8.504,34.254 h1
  text "H_U" at 70.504,32.921 h1
  text "L_V" at 70.504,30.421 h1
  text "H_V" at 70.504,27.921 h1
  text "TEMP" at 6.004,27.754 h1
  text "L_W" at 70.504,25.421 h1
  text "H_W" at 70.504,22.671 h1
  text "RS" at 6.254,18.254 h1
  text "CLK" at 70.254,13.254 h1
  text "GND" at 8.254,12.004 h1
  text "DIO" at 70.004,10.754 h1
  text "Pot" at 8.504,9.504 h1
  text "+5V" at 70.004,8.254 h1
  text "+5V" at 8.254,7.004 h1
  text "GND" at 70.004,5.754 h1
  text "GND" at 13.754,3.996 h1 r270
  text "RESET" at 16.254,3.996 h0.7 r270
  text "GND" at 26.254,3.996 h1 r270
  text "REV" at 28.754,3.996 h0.8 r270
  text "GND" at 37.504,3.996 h1 r270
  text "GND" at 48.754,3.996 h1 r270
  text "+5V" at 51.254,3.996 h1 r270
  text "DIO" at 54.004,3.996 h1 r270
  text "CLK" at 56.504,3.996 h1 r270
  text "POT_SW" at 40.004,3.137 h0.8
Mechanical 1:
  lines w0.5: 0,2 ccw(c2,2) 2,0 72,0 ccw(c72,2) 74,2 74,52 ccw(c72,52) 72,54 55.5,54 18.5,54 2,54 ccw(c2,52) 0,52 0,2